# EAGLE board 51-zduino (EAGLE 5.07)
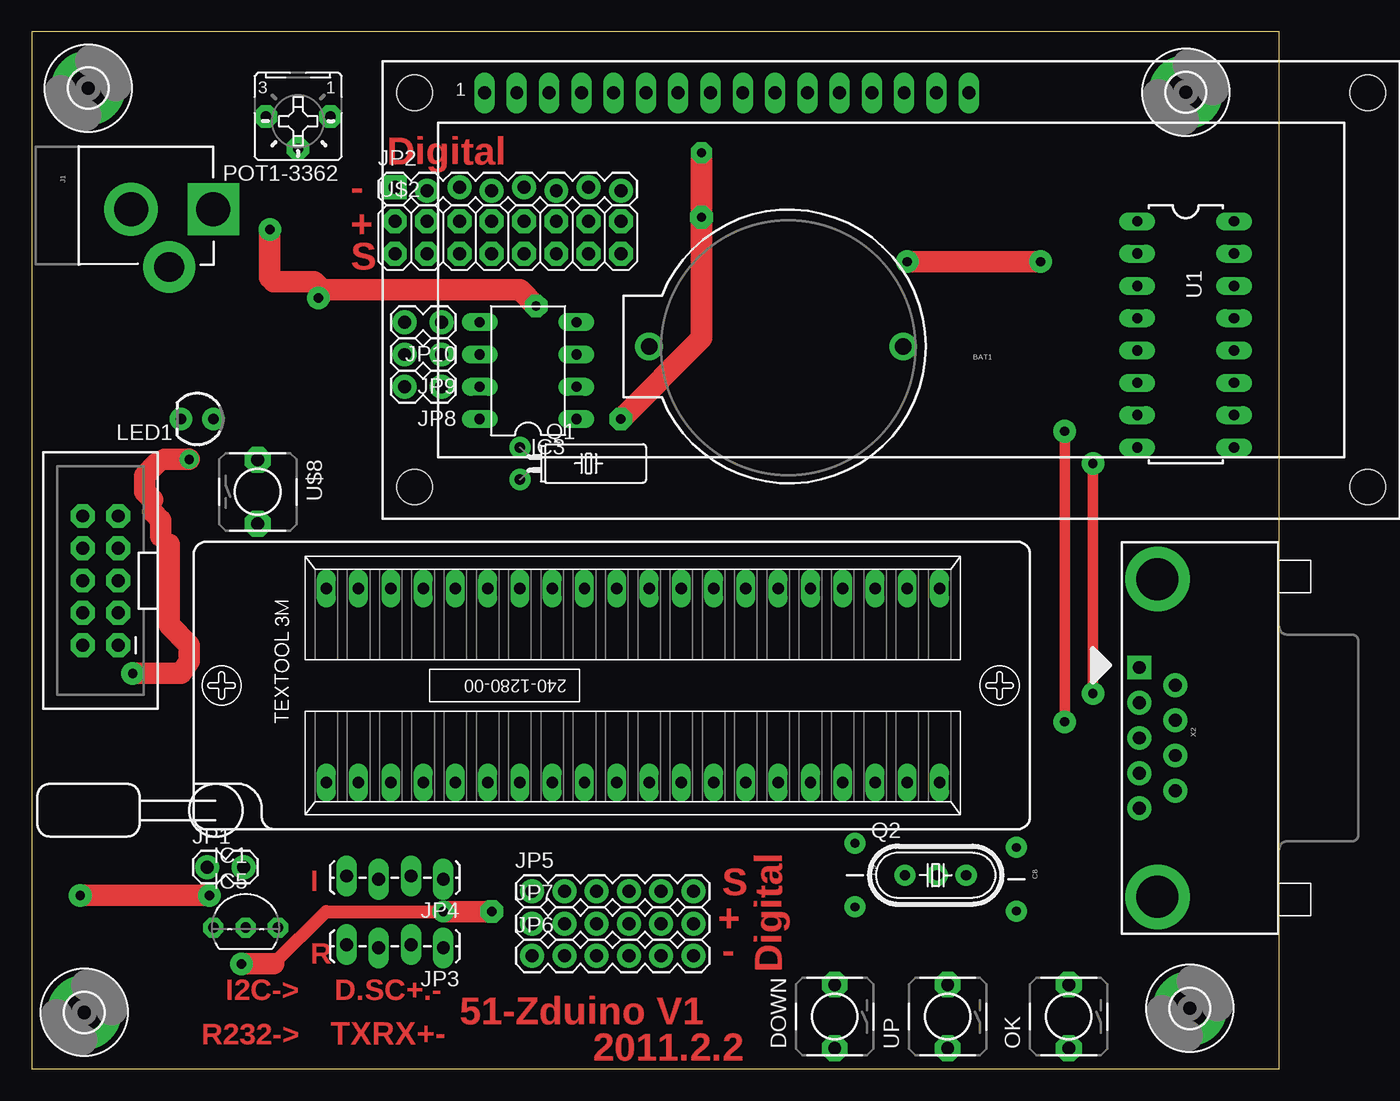
[diagram p0: board, top side]
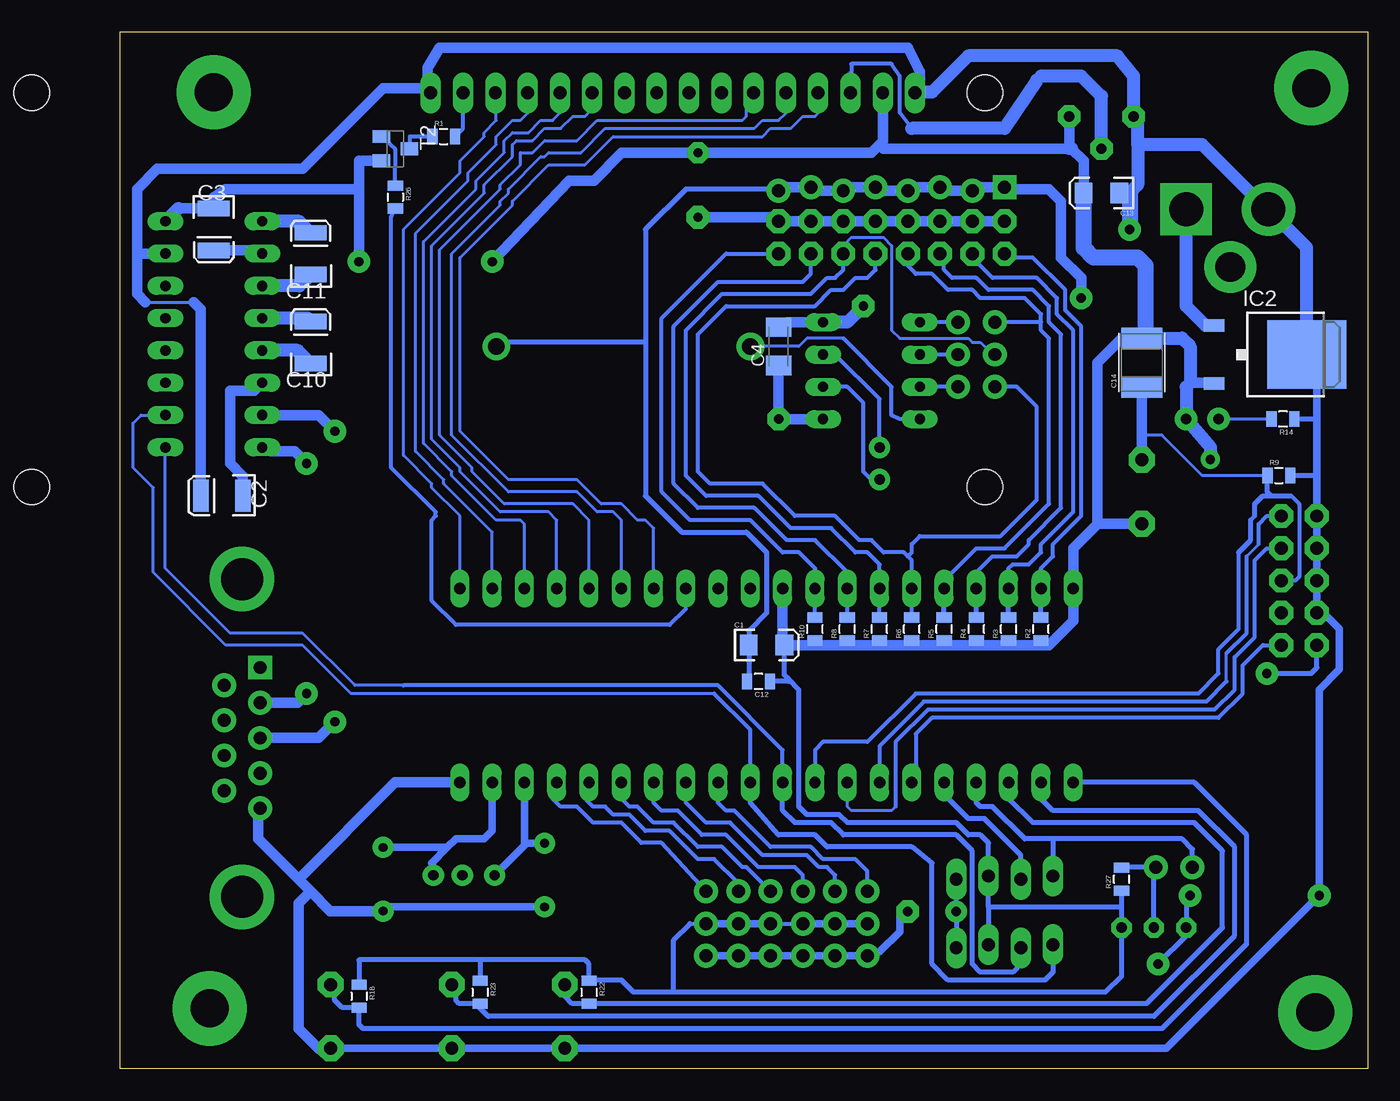
[diagram p1: board, bottom side, seen from below]

Size 98.17 x 81.58 mm. Coordinates in mm from the lower left corner, seen from the top.
Outline: 0,0 98.17,0 98.17,81.58 0,81.58 0,0
Copper layers (1*16): Top 0.035mm / dielectric 1.5mm / Bottom 0.035mm
Design rules "SparkFun-HP1007-600x600dpi *": minimum track width 10mil, minimum drill 20mil, track to track 8mil, track to pad 8mil, pad to pad 8mil, via to via 8mil, smd to smd 8mil, copper to edge 12mil, drill to drill 28mil, minimum pad ring 12mil, minimum via ring 10mil, stop-mask expansion 4mil, vias tented up to drill 25mil, thermal gap 10mil

## Footprints (pad centres in the part's own frame; a part is rotated, then mirrored left to right if it is on the bottom)
BATTCOM_20MM_PTH = drill 1.3 pad 2.184 round: 1 20,0; 2 0,0
EIA3216 = smd 1.4 x 1.6: A 1.4,0; C -1.4,0
EIA3528 = smd 1.2 x 2.5: A 1.65,0; C -1.65,0
C1206K = smd 1.5 x 2: 1 -1.5,0; 2 1.5,0
CAP-PTH-5MM = drill 0.7 pad 1.651 round: 1 -2.5,0; 2 2.5,0
0805 = smd 0.8 x 1.2: 1 -0.9,0; 2 0.9,0
GRM43D = smd 1.65 x 3.2: A 1.927,0; C -1.927,0
ALPS-SKHV = drill 1.016 pad 2.032 octagon: 2 -2.51,0; 3 2.51,0
3,0-PAD = drill 3 pad 5.842 round: B3,0 0,0
240-1280-00-0602J = drill 0.9 long: 1 -24.13,-7.62; 2 -21.59,-7.62; 3 -19.05,-7.62; 4 -16.51,-7.62; 5 -13.97,-7.62; 6 -11.43,-7.62; 7 -8.89,-7.62; 8 -6.35,-7.62; 9 -3.81,-7.62; 10 -1.27,-7.62; 11 1.27,-7.62; 12 3.81,-7.62; 13 6.35,-7.62; 14 8.89,-7.62; 15 11.43,-7.62; 16 13.97,-7.62; 17 16.51,-7.62; 18 19.05,-7.62; 19 21.59,-7.62; 20 24.13,-7.62; 21 24.13,7.62; 22 21.59,7.62; 23 19.05,7.62; 24 16.51,7.62; 25 13.97,7.62; 26 11.43,7.62; 27 8.89,7.62; 28 6.35,7.62; 29 3.81,7.62; 30 1.27,7.62; 31 -1.27,7.62; 32 -3.81,7.62; 33 -6.35,7.62; 34 -8.89,7.62; 35 -11.43,7.62; 36 -13.97,7.62; 37 -16.51,7.62; 38 -19.05,7.62; 39 -21.59,7.62; 40 -24.13,7.62
TO252 = smd 1 x 1.6: 1 -2.28,-4.8; 2 2.28,-4.8 | smd 5.4 x 6.2: 3 0,2.5
PDIP8 = drill 0.813 long: 1 -3.81,-3.81; 2 -1.27,-3.81; 3 1.27,-3.81; 4 3.81,-3.81; 5 3.81,3.81; 6 1.27,3.81; 7 -1.27,3.81; 8 -3.81,3.81
TO92- = drill 0.813 pad 1.575 octagon: 1 -2.54,0; 2 0,0; 3 2.54,0
POWER_JACK_2.1X5.5_BIG_PTH = drill 2.667 pad 4.191 round: GND 0,-0.127 | drill 2.337 pad 4.064 round: GNDBREAK 4.547,2.87 | drill 2.667 pad 4.064 square: PWR 0,6.35
1X02_LOCK = drill 1.016 pad 1.88 round: 1 -1.448,0; 2 1.448,0
1X08_LOCK = drill 1.016 pad 1.88 square: 1 -8.89,0.127 | drill 1.016 pad 1.88 round: 2 -6.35,-0.127; 3 -3.81,0.127; 4 -1.27,-0.127; 5 1.27,0.127; 6 3.81,-0.127; 7 6.35,0.127; 8 8.89,-0.127
1X04_LOCK_LONGPADS = drill 1.016 long: 1 -3.81,0; 2 -1.27,-0.254; 3 1.27,0; 4 3.81,-0.254
1X06 = drill 1.016 pad 1.88 round: 1 -6.35,0; 2 -3.81,0; 3 -1.27,0; 4 1.27,0; 5 3.81,0; 6 6.35,0
LED3MM = drill 0.813 pad 1.778 round: A -1.27,0; K 1.27,0
B25P = drill 0.813 pad 1.778 octagon: A -2.54,0; E 2.54,0; S 0,2.54
TC38H = drill 0.813 pad 1.676 round: 1 -1.27,0; 2 1.27,0
HC49U-V-SOCK = drill 0.813 pad 1.676 round: 1 -2.413,0; 2 2.413,0; 3 0.127,0
SOT23-BEC = smd 1 x 1.4: B -0.95,-1.1; C 0,1.1; E 0.95,-1.1
DIL16 = drill 0.813 long: 1 -8.89,-3.81; 2 -6.35,-3.81; 3 -3.81,-3.81; 4 -1.27,-3.81; 5 1.27,-3.81; 6 3.81,-3.81; 7 6.35,-3.81; 8 8.89,-3.81; 9 8.89,3.81; 10 6.35,3.81; 11 3.81,3.81; 12 1.27,3.81; 13 -1.27,3.81; 14 -3.81,3.81; 15 -6.35,3.81; 16 -8.89,3.81
LCD-16X2 = drill 1.016 long: 1 -32,15.5; 2 -29.46,15.5; 3 -26.92,15.5; 4 -24.38,15.5; 5 -21.84,15.5; 6 -19.3,15.5; 7 -16.76,15.5; 8 -14.22,15.5; 9 -11.68,15.5; 10 -9.14,15.5; 11 -6.6,15.5; 12 -4.06,15.5; 13 -1.52,15.5; 14 1.02,15.5; 15 3.56,15.5; 16 6.1,15.5 | hole 2.8: -37.5,15.5; -37.5,-15.5; 37.5,15.5; 37.5,-15.5
2X8 = drill 1.016 pad 1.88 octagon: 1 -8.89,-1.27; 2 -8.89,1.27; 3 -6.35,-1.27; 4 -6.35,1.27; 5 -3.81,-1.27; 6 -3.81,1.27; 7 -1.27,-1.27; 8 -1.27,1.27; 9 1.27,-1.27; 10 1.27,1.27; 11 3.81,-1.27; 12 3.81,1.27; 13 6.35,-1.27; 14 6.35,1.27; 15 8.89,-1.27; 16 8.89,1.27
2X5-SHROUDED_LOCK = drill 1.016 pad 1.88 octagon: 1 -5.08,-1.397; 2 -5.08,1.397; 3 -2.54,-1.397; 4 -2.54,1.397; 5 0,-1.397; 6 0,1.397; 7 2.54,-1.397; 8 2.54,1.397; 9 5.08,-1.397; 10 5.08,1.397
DB9-FEMALE/90 = drill 1.016 pad 1.88 square: 1 -5.54,-1.42 | drill 1.016 pad 1.88 round: 2 -2.77,-1.42; 3 0,-1.42; 4 2.77,-1.42; 5 5.54,-1.42; 6 -4.15,1.42; 7 -1.38,1.42; 8 1.38,1.42; 9 4.15,1.42 | drill 3.302 pad 5.08 round: G1 -12.5,0; G2 12.5,0

## Placement (x,y rotation side)
BAT1  [BATTCOM_20MM_PTH]  68.58,56.83 180 top
C1  10u  [EIA3216]  47.31,33.34 0 bottom
C2  10uF  [EIA3528]  90.17,45.09 180 bottom
C3  10uF  [EIA3528]  90.81,66.04 270 bottom
C4  10uF  [C1206K]  46.35,56.83 90 bottom
C8  33pF  [CAP-PTH-5MM]  77.47,14.92 270 top
C9  33pF  [CAP-PTH-5MM]  64.77,15.24 270 top
C10  10uF  [EIA3528]  83.19,57.15 90 bottom
C11  10uF  [EIA3528]  83.19,64.14 90 bottom
C12  104  [0805]  47.94,30.48 180 bottom
C13  10u  [EIA3216]  20.95,68.9 180 bottom
C14  10u  [GRM43D]  17.78,55.56 90 bottom
DOWN  OK  [ALPS-SKHV]  63.18,4.13 90 top
H1  MOUNT-PAD-ROUND3.0  [3,0-PAD]  4.13,4.45 0 top
H2  MOUNT-PAD-ROUND3.0  [3,0-PAD]  91.12,4.76 0 top
H3  MOUNT-PAD-ROUND3.0  [3,0-PAD]  90.81,76.83 0 top
H4  MOUNT-PAD-ROUND3.0  [3,0-PAD]  4.45,77.15 0 top
IC1  AT89S51-ZS  [240-1280-00-0602J]  47.31,30.16 0 top
IC2  7805DT  [TO252]  7.3,56.2 270 bottom
IC3  [PDIP8]  39.05,54.93 90 top
IC5  DS18B20  [TO92-]  16.83,11.11 0 top
J1  POWER  [POWER_JACK_2.1X5.5_BIG_PTH]  7.94,67.63 270 top
JP1  [1X02_LOCK]  15.24,15.88 0 top
JP2  [1X08_LOCK]  37.47,69.22 0 top
JP3  RS232  [1X04_LOCK_LONGPADS]  28.57,9.53 180 top
JP4  IIC  [1X04_LOCK_LONGPADS]  28.57,14.92 180 top
JP5  [1X06]  45.72,13.97 0 top
JP6  [1X06]  45.72,8.89 0 top
JP7  [1X06]  45.72,11.43 0 top
JP8  [1X02_LOCK]  30.8,53.66 180 top
JP9  [1X02_LOCK]  30.8,56.2 180 top
JP10  [1X02_LOCK]  30.8,58.74 180 top
LED1  RED  [LED3MM]  13.02,51.12 180 top
OK  [ALPS-SKHV]  81.6,4.13 90 top
POT1-3362  10k  [B25P]  20.95,74.93 180 top
Q1  [TC38H]  38.42,47.62 270 top
Q2  12Mhz  [HC49U-V-SOCK]  71.12,15.24 0 top
R1  410  [0805]  72.71,73.34 0 bottom
R2  4.7k  [0805]  25.72,34.61 90 bottom
R3  4.7k  [0805]  28.26,34.61 90 bottom
R4  4.7k  [0805]  30.8,34.61 90 bottom
R5  4.7k  [0805]  33.34,34.61 90 bottom
R6  4.7k  [0805]  35.88,34.61 90 bottom
R7  4.7k  [0805]  38.42,34.61 90 bottom
R8  4.7k  [0805]  40.96,34.61 90 bottom
R9  10k  [0805]  6.99,46.67 0 bottom
R10  4.7k  [0805]  43.5,34.61 90 bottom
R14  270  [0805]  6.67,51.12 180 bottom
R18  10k  [0805]  79.38,5.71 270 bottom
R22  10k  [0805]  61.28,6.03 270 bottom
R23  10k  [0805]  69.85,6.03 270 bottom
R26  1k  [0805]  76.52,68.58 270 bottom
R27  4.7k  [0805]  19.37,14.92 90 bottom
T2  8550  [SOT23-BEC]  76.52,72.39 270 bottom
U1  MAX232PTH  [DIL16]  90.81,57.78 270 top
U$1  LCD-16X2  [LCD-16X2]  67.63,61.28 0 top
U$2  M08X2  [2X8]  37.47,65.41 0 top
U$6  AVR_PROG  [2X5-SHROUDED_LOCK]  5.4,38.42 90 top
U$8  RESET  [ALPS-SKHV]  17.78,45.4 270 top
UP  UP  [ALPS-SKHV]  72.07,4.13 90 top
X2  [DB9-FEMALE/90]  88.58,26.04 270 top

## Library data of the parts
BAT1 C1 C12-C14 JP1-JP10 Q1 U1 U$2 U$6 = SparkFun
C2-C4 C8-C11 DOWN IC1 IC5 J1 LED1 OK POT1-3362 Q2 R1-R10 R14 R18 R22 R23 R26 R27 T2 U$1 U$8 UP X2 = digital-toy
H1-H4 = holes
IC2 = linear
IC3 = ltc1440_lt1529_ds1302

## Nets
1W: IC5.2 JP1.2 R27.2
+VIN: IC2.1 J1.PWR
DS18B: IC1.4 JP1.1 JP4.4
DS_IO: IC1.34 JP9.2 R7.2 U$2.11
DS_RST: IC1.36 JP10.2 R5.2 U$2.7
DS_SCK: IC1.35 JP8.2 R6.2 U$2.9
GND: BAT1.2 C1.C C2.A C4.2 C8.2 C9.2 C12.2 C13.C DOWN.2 IC1.20 IC2.3 IC3.4 IC5.1 J1.GND JP2.1 JP2.2 JP2.3 JP2.4 JP2.5 JP2.6 JP2.7 JP2.8 JP3.1 JP4.1 JP6.1 JP6.2 JP6.3 JP6.4 JP6.5 JP6.6 OK.2 POT1-3362.E R9.2 R14.1 U1.15 U$1.1 U$1.16 U$6.4 U$6.6 U$6.8 U$6.10 UP.2 X2.5
KD: IC1.1 OK.3 R18.2
KO: DOWN.3 IC1.3 R22.2
KU: IC1.2 R23.2 UP.3
MISO: IC1.7 U$6.9
MOSI: IC1.6 U$6.1
N$1: IC1.27 U$1.4
N$2: IC1.26 U$1.5
N$3: IC1.25 U$1.6
N$4: IC1.24 U$1.11
N$5: IC1.23 U$1.12
N$6: C2.C U1.6
N$7: IC1.21 U$1.14
N$8: C10.C U1.5
N$9: C10.A U1.4
N$10: C11.A U1.1
N$11: C3.A U1.2
N$12: C11.C U1.3
N$13: U1.7 X2.3
N$14: C9.1 IC1.18 Q2.1
N$15: POT1-3362.S U$1.3
N$16: R1.2 U$1.15
N$17: LED1.K R14.2
N$18: IC1.28 R26.2
N$19: R1.1 T2.C
N$20: IC1.38 R3.2 U$2.3
N$21: IC1.37 R4.2 U$2.5
N$23: IC1.22 U$1.13
N$24: U1.8 X2.2
N$27: IC1.33 R8.2 U$2.13
N$28: IC1.32 R10.2 U$2.15
N$29: IC1.5 JP4.3
N$30: IC1.12 JP5.1
N$31: IC1.13 JP5.2
N$32: IC1.14 JP5.3
N$33: IC1.15 JP5.4
N$34: C8.1 IC1.19 Q2.2
N$35: IC1.16 JP5.5
N$36: IC1.17 JP5.6
N$37: IC3.2 Q1.2
N$38: IC3.3 Q1.1
N$39: BAT1.1 IC3.8
N$40: IC3.7 JP8.1
N$41: IC3.6 JP9.1
N$42: IC3.5 JP10.1
N$55: R26.1 T2.B
P0.0: IC1.39 R2.2 U$2.1
RST: C14.C IC1.9 R9.1 U$6.5 U$8.2
RXD2: IC1.10 JP3.3 U1.9
SCK: IC1.8 U$6.7
TXD2: IC1.11 JP3.4 U1.10
VCC: C1.A C3.C C4.1 C12.1 C13.A C14.A IC1.31 IC1.40 IC2.2 IC3.1 IC5.3 JP3.2 JP4.2 JP7.1 JP7.2 JP7.3 JP7.4 JP7.5 JP7.6 LED1.A POT1-3362.A R2.1 R3.1 R4.1 R5.1 R6.1 R7.1 R8.1 R10.1 R18.1 R22.1 R23.1 R27.1 T2.E U1.16 U$1.2 U$2.2 U$2.4 U$2.6 U$2.8 U$2.10 U$2.12 U$2.14 U$2.16 U$6.2 U$8.3

## Tracks (layer width: path | path; a pad name or v marks a point on that pad's centre or on a via)
1W
  Bottom 0.406: IC5.2 16.83,15.73 JP1.2 19.32,15.88 R27.2
+VIN
  Bottom 1.016: IC2.1 12.76,58.48 14.29,60.01 J1.PWR
DS18B
  Bottom 0.406: IC1.4 30.8,20.95 30.48,20.64 29.53,20.64 26.99,18.1 24.77,18.1 | 24.77,18.1 JP4.4 | JP1.1 13.79,17.29 14.61,18.1 24.77,18.1
DS_IO
  Bottom 0.254: 29.53,56.2 30.48,57.15 31.11,57.15 31.43,57.47 36.83,57.47 37.47,58.1 37.47,64.77 38.1,65.41 40.64,65.41 41.27,64.77 U$2.11
  Bottom 0.305: R7.2 IC1.34 38.42,39.69 39.37,40.64 40.32,40.64 42.23,42.55 45.4,42.55 47.94,45.09 52.07,45.09 53.66,46.67 53.66,58.1 50.8,60.96 43.81,60.96 42.55,62.23 41.91,62.23 41.27,62.87 U$2.11 | 29.53,56.2 JP9.2
DS_RST
  Bottom 0.305: IC1.36 33.34,38.42 30.8,40.96 28.57,40.96 25.08,44.45 25.08,57.47 25.72,58.1 25.72,58.74 | 25.72,58.74 25.72,59.37 26.99,60.64 30.48,60.64 31.11,61.28 33.02,61.28 34.29,62.55 35.56,62.55 36.2,63.18 U$2.7 | 25.72,58.74 JP10.2
  Bottom 0.406: R5.2 IC1.36
DS_SCK
  Bottom 0.305: R6.2 IC1.35 35.88,40.01 36.2,40.32 | 36.2,40.32 36.51,40.64 38.1,40.64 39.05,41.59 40.01,41.59 41.91,43.5 45.09,43.5 47.62,46.04 51.75,46.04 52.7,46.99 52.7,57.78 50.48,60.01 43.5,60.01 42.23,61.28 41.27,61.28 40.32,62.23 39.37,62.23 38.73,62.87 U$2.9 | JP8.2 27.62,53.66 26.04,52.07 26.04,44.77 28.89,41.91 35.24,41.91 35.88,41.27 35.88,40.64 36.2,40.32
GND  (via drill 0.74 pad 1.68, 0.74 pad 1.78)
  Top 1.016: 19.05,8.26 23.18,12.38 v32.38,12.38
  Top 1.27: 22.54,61.59 v22.54,60.64 | 18.73,62.23 19.05,61.91
  Top 1.676: v3.81,13.65 v13.97,13.65 | v16.51,8.26 19.05,8.26 | 22.54,61.59 22.23,61.91 19.05,61.91 | v18.73,66.04 18.73,62.23 | v32.38,12.38 v36.2,12.38 | v22.54,60.64 23.18,61.28 38.42,61.28 v39.69,60.01
  Bottom 0.254: 4,56.03 IC2.3 | U$1.16 74.1,77.15 | 96.2,60.33 92.39,60.33
  Bottom 0.305: 73.98,77.03 U$1.16 | JP2.1 28.45,69.22 | JP6.1 38.73,9.21
  Bottom 0.406: 4,51.12 R14.1 | 4,46.67 R9.2 | 3.49,35.88 U$6.4 | 18.73,68.9 C13.C | 18.1,74.61 POT1-3362.E | 35.57,76.83 U$1.1 | UP.2 DOWN.2 | C8.2 77.15,12.74 | JP4.1 v32.38,12.38 JP3.1 | v13.97,13.65 14.29,13.34 IC5.1 14.29,10.48 v16.51,8.26 | 82.55,1.59 81.63,1.59 OK.2 | 56.83,57.15 56.83,66.04 53.66,69.22 46.48,69.22 JP2.8 | 56.83,57.15 56.83,45.09 53.98,42.23 48.9,42.23 47.31,40.64 47.31,35.88 48.71,34.48 C1.C 48.71,30.48 C12.2 | BAT1.2 68.26,57.15 56.83,57.15
  Bottom 0.61: U$6.4 U$6.6 U$6.8 U$6.10 4,46.67 4,51.12 4,56.03 | 3.49,35.88 2.22,34.61 2.22,31.43 3.81,29.84 v3.81,13.65 15.85,1.62 UP.2 OK.2 | 77.15,12.74 C9.2 | JP6.6 JP6.5 JP6.4 JP6.3 JP6.2 JP6.1 38.42,9.21 36.83,10.79 36.83,12.06 v36.2,12.38
  Bottom 0.813: 35.24,77.16 35.24,78.42 36.2,80.33 73.03,80.33 73.98,78.74 73.98,77.03 | JP2.8 46.1,69.34 JP2.7 43.56,69.09 JP2.6 41.02,69.34 JP2.5 38.48,69.09 JP2.4 35.94,69.34 JP2.3 33.4,69.09 JP2.2 30.86,69.34 JP2.1 28.57,69.22 25.08,69.22 24.13,68.26 24.13,63.82 22.54,62.23 v22.54,60.64 | 82.55,1.59 84.14,3.17 84.14,13.02 83.19,13.97 | IC3.4 45.72,58.74 C4.2 | 96.84,64.14 U1.15 | 96.84,64.14 96.84,69.22 95.25,70.8 83.82,70.8 77.47,77.15 74.1,77.15 | C2.A 91.82,59.75 92.39,60.33 | 96.2,60.33 96.84,60.96 96.84,64.14 | C8.2 81.64,12.42 83.19,13.97 | 83.19,13.97 84.14,14.92 | 84.14,14.92 87.31,18.1 87.31,20.34 | IC1.20 76.52,22.54 84.14,14.92
  Bottom 1.016: IC2.3 4.8,64.62 J1.GND 7.94,67.63 13.02,72.71 18.1,72.71 | 18.73,68.9 18.1,69.53 18.1,72.71 | 18.1,72.71 18.1,74.61 | POT1-3362.E 18.41,78.11 19.68,79.69 31.43,79.69 34.29,76.83 35.57,76.83 | U$1.1 35.24,77.16 | IC3.4 40.96,58.74 v39.69,60.01 | 87.31,20.34 X2.5
  Bottom 1.27: 18.73,68.9 v18.73,66.04
  pour Bottom (isolate 1.016, hatched): -24.45,111.76 143.83,99.38 143.83,86.36 -23.18,92.08
  pour Top (isolate 2.54, hatched): -11.11,-15.24 115.57,-9.84 115.25,-22.54 -12.7,-33.97
KD
  Bottom 0.406: IC1.1 13.65,22.54 9.53,18.41 9.53,9.84 16.19,3.17 79.06,3.17 79.38,3.49 R18.2 80.7,4.82 81.28,5.4 81.28,6.32 OK.3
KO
  Bottom 0.406: IC1.3 28.26,21.27 26.35,19.37 13.65,19.37 11.43,17.14 11.43,11.11 17.41,5.13 R22.2 62.6,5.13 63.18,5.71 DOWN.3
KU
  Bottom 0.406: IC1.2 25.72,21.27 24.77,20.32 13.34,20.32 10.48,17.46 10.48,10.48 16.83,4.13 69.22,4.13 69.85,4.76 R23.2 71.49,5.13 71.75,5.4 71.75,6.32 UP.3
MISO
  Bottom 0.254: 9.53,40.32 8.57,41.27 | 11.11,30.48 11.11,32.7
  Bottom 0.305: U$6.9 7.94,43.5 8.57,42.86 8.57,41.27 | 9.53,40.32 9.53,34.29 11.11,32.7 | 11.11,30.48 12.7,28.89 34.92,28.89 38.42,25.4 IC1.7
MOSI
  Bottom 0.305: U$6.1 8.26,33.34 9.84,31.75 9.84,29.53 11.75,27.62 34.29,27.62 35.56,26.35 35.56,22.86 IC1.6
N$1
  Bottom 0.254: IC1.27 56.2,42.55 56.83,43.18 57.47,43.18 58.74,44.45 60.33,44.45 62.23,46.35 67.63,46.35 71.44,50.16 71.44,63.82 67.31,67.94 67.31,68.26 64.45,71.12 61.59,71.12 59.37,73.34 47.62,73.34 46.99,73.98 45.4,73.98 44.45,74.93 43.5,74.93 42.86,75.56 42.86,76.39 U$1.4
N$2
  Bottom 0.254: U$1.5 45.79,75.18 46.35,74.61 47.62,74.61 48.26,73.98 60.01,73.98 61.91,72.07 64.45,72.07 64.77,71.75 65.09,71.75 67.63,69.22 67.63,68.9 68.26,68.26 68.26,67.94 72.07,64.14 72.07,49.85 67.63,45.4 62.23,45.4 60.64,43.81 59.37,43.81 58.74,43.18 IC1.26
N$3
  Bottom 0.254: IC1.25 61.28,43.18 62.55,44.45 67.94,44.45 70.48,46.99 70.48,47.31 73.03,49.85 73.03,64.45 68.26,69.22 68.26,69.53 66.67,71.12 66.67,72.07 65.72,72.07 64.77,73.03 62.23,73.03 60.64,74.61 49.21,74.61 48.9,74.93 48.9,76.21 U$1.6
N$4
  Bottom 0.254: U$1.11 61.03,75.5 61.59,74.93 62.55,74.93 63.5,73.98 64.77,73.98 65.72,73.03 66.99,73.03 67.31,72.71 67.31,71.75 69.53,69.53 69.53,68.9 73.66,64.77 73.66,49.53 71.44,47.31 71.44,46.99 68.26,43.81 64.45,43.81 63.82,43.18 IC1.24
N$5
  Bottom 0.254: IC1.23 66.36,42.86 66.67,43.18 68.58,43.18 72.07,46.67 72.07,46.99 74.3,49.21 74.3,65.09 70.17,69.22 70.17,69.85 67.94,72.07 67.94,73.03 67.31,73.66 66.04,73.66 65.09,74.61 64.14,74.61 63.5,75.25 63.5,76.71 U$1.12
N$6
  Bottom 0.813: C2.C 88.52,46.61 89.53,47.62 89.53,53.34 87.63,53.34 U1.6
N$7
  Bottom 0.254: IC1.21 71.44,43.5 73.66,45.72 73.66,46.04 75.88,48.26 75.88,66.04 71.44,70.48 71.44,71.44 69.53,73.34 69.53,73.66 68.58,74.61 68.58,76.71 U$1.14
N$8
  Bottom 1.016: U1.5 84.2,56.52 C10.C
N$9
  Bottom 0.305: C10.A 83.44,59.05
  Bottom 1.016: 83.44,59.05 U1.4
N$10
  Bottom 1.016: U1.1 84.08,66.67 C11.A
N$11
  Bottom 0.813: C3.A 87.25,64.39 U1.2
N$12
  Bottom 1.016: U1.3 84.08,61.59 C11.C
N$13  (via drill 0.74 pad 1.78)
  Top 0.813: v81.28,27.3 v81.28,50.16
  Bottom 0.813: X2.3 82.55,26.04 v81.28,27.3 | v81.28,50.16 82.55,51.44 U1.7
N$14
  Bottom 0.406: 66.36,17.59 66.36,17.78 66.32,17.74
  Bottom 0.61: 66.36,17.78 IC1.18 | 66.36,17.59 Q2.1 | C9.1 66.32,17.74
N$15
  Bottom 0.305: 35.88,73.98 36.83,75.25 36.83,78.11 37.47,79.06 40.64,79.06 40.64,78.42 40.96,78.11 40.96,76.52 40.64,76.2 40.64,76.71 U$1.3
  Bottom 0.406: 25.72,78.11 26.04,77.79
  Bottom 1.016: 26.04,77.79 28.57,73.98 35.88,73.98 | POT1-3362.S 20.95,76.52 22.54,78.11 25.72,78.11
N$16
  Bottom 0.305: U$1.15 71.19,73.96 R1.2
N$17
  Bottom 0.254: R14.2 LED1.K
N$18
  Bottom 0.305: IC1.28 53.66,36.2 54.93,34.92 71.75,34.92 73.66,36.83 73.66,43.18 73.34,43.5 73.34,43.81 76.83,47.31 76.83,67.05 R26.2
N$19
  Bottom 0.305: R1.1 75.39,73.34 T2.C
N$20
  Bottom 0.305: IC1.38 28.26,39.37 27.94,39.69 26.67,39.69 25.72,40.64 25.72,41.27 23.18,43.81 23.18,58.1 24.45,59.37 24.45,60.64 26.04,62.23 29.53,62.23 30.8,63.5 30.8,63.82 U$2.3
  Bottom 0.406: R3.2 IC1.38
N$21
  Bottom 0.305: IC1.37 30.8,39.05 29.53,40.32 27.62,40.32 26.67,41.27 26.67,41.59 24.13,44.13 24.13,57.78 25.08,58.74 25.08,60.01 26.35,61.28 29.84,61.28 30.8,62.23 32.7,62.23 33.34,62.87 33.34,63.82 U$2.5
  Bottom 0.406: R4.2 IC1.37
N$23
  Bottom 0.254: IC1.22 68.9,42.23 72.71,46.04 72.71,46.35 74.93,48.58 74.93,65.72 70.8,69.85 70.8,70.48 68.58,72.71 68.58,73.34 67.31,74.61 66.67,74.61 66.04,75.25 66.04,76.71 U$1.13
N$24  (via drill 0.74 pad 1.78)
  Top 0.813: v83.5,29.53 v83.5,47.62
  Bottom 0.813: X2.2 84.22,28.8 v83.5,29.53 | v83.5,47.62 84.45,48.58 86.04,48.58 86.36,48.9
  Bottom 1.016: 86.36,48.9 U1.8
N$27
  Bottom 0.305: R8.2 IC1.33 40.96,39.05 43.5,41.59 45.72,41.59 48.26,44.13 52.7,44.13 54.61,46.04 54.61,58.42 51.12,61.91 44.45,61.91 43.81,62.55 U$2.13
N$28
  Bottom 0.305: R10.2 IC1.32 43.5,39.37 44.77,40.64 46.04,40.64 48.58,43.18 53.34,43.18 55.56,45.4 55.56,59.05 50.48,64.14 U$2.15
N$29
  Bottom 0.406: IC1.5 33.34,21.59 31.43,19.68 30.16,19.68 27.3,16.83 JP4.3
N$30
  Bottom 0.305: JP5.1 39.37,15.56 40.32,16.51 42.86,16.51 43.81,17.46 46.99,17.46 49.85,20.32 50.48,20.32 51.12,20.95 IC1.12
N$31
  Bottom 0.305: JP5.2 41.91,15.24 42.55,15.88 43.18,15.88 44.13,16.83 47.62,16.83 50.16,19.37 52.07,19.37 53.66,20.95 IC1.13
N$32
  Bottom 0.305: JP5.3 44.45,15.24 45.09,15.88 47.94,15.88 50.48,18.41 52.39,18.41 54.29,20.32 55.56,20.32 56.2,20.95 IC1.14
N$33
  Bottom 0.305: JP5.4 48.9,15.88 49.21,15.88 50.8,17.46 52.7,17.46 54.61,19.37 56.2,19.37 57.47,20.64 58.1,20.64 58.74,21.27 IC1.15
N$34
  Bottom 0.406: 73.66,15.37 73.66,16.19
  Bottom 0.61: IC1.19 68.9,18.73 69.53,18.1 71.75,18.1 72.43,17.42 | 73.66,16.19 72.43,17.42 | Q2.2 73.66,15.37 | 72.43,17.42 C8.1
N$35
  Bottom 0.305: JP5.5 49.53,14.61 51.44,16.51 52.7,16.51 54.93,18.73 56.83,18.73 58.1,20 59.37,20 60.01,20.64 60.96,20.64 61.59,21.27 61.59,22.23 IC1.16
N$36
  Bottom 0.305: JP5.6 55.56,17.78 57.15,17.78 58.74,19.37 60.96,19.37 62.23,20.64 63.5,20.64 64.14,21.27 64.14,22.23 IC1.17
N$37
  Bottom 0.305: Q1.2 39.05,46.35 39.69,46.99 39.69,52.39 40.96,53.66 IC3.2
N$38
  Bottom 0.305: Q1.1 38.42,52.7 41.91,56.2 IC3.3
N$39
  Bottom 0.254: 41.27,57.47 44.13,57.47 44.77,56.83 BAT1.1
  Bottom 0.305: IC3.8 36.83,51.12 37.47,51.44 37.47,53.66 41.27,57.47
N$40
  Bottom 0.305: JP8.1 IC3.7
N$41
  Bottom 0.305: JP9.1 IC3.6
N$42
  Bottom 0.305: JP10.1 IC3.5
N$55
  Bottom 0.305: T2.B 76.52,72.34 R26.1
P0.0
  Bottom 0.305: IC1.39 25.72,39.37 24.77,40.32 24.77,41.27 22.54,43.5 22.54,58.42 23.81,59.69 23.81,61.28 26.35,63.82 28.26,63.82 U$2.1
  Bottom 0.406: R2.2 IC1.39
RST
  Bottom 0.254: R9.1 13.02,46.67 16.19,49.85 17.78,49.85 | 17.75,47.97 U$8.2
  Bottom 0.305: U$6.5 5.71,38.42 5.4,38.73 5.4,44.45 6.03,45.09 | 9.21,43.18 8.89,43.5 | 10.16,40.64 10.16,34.61 11.75,33.02 11.75,31.11 13.34,29.53 35.56,29.53 39.37,25.72 42.86,25.72 43.5,25.08 IC1.9
  Bottom 0.406: 7.62,45.09 8.26,45.09 8.89,44.45 8.89,43.5 | 7.62,45.09 6.03,45.09 | 9.21,43.18 9.21,41.59 10.16,40.64 | R9.1 7.88,45.35 7.62,45.09
  Bottom 0.813: C14.C 17.78,49.85 17.78,48.58 17.75,47.97
RXD2
  Bottom 0.254: 75.88,30.16 79.69,30.16 83.82,34.29 89.53,34.29 94.61,39.37 U1.9
  Bottom 0.305: 75.88,30.16 51.12,30.16 46.04,25.08 IC1.10
  Bottom 0.406: IC1.10 46.04,20.32 45.09,19.37 42.23,19.37 41.27,18.41 32.38,18.41 31.11,17.14 31.11,8.26 30.48,7.62 27.94,7.62 27.3,8.26 JP3.3
SCK
  Bottom 0.254: 37.15,20.64 37.47,20.32 40.64,20.32 40.96,20.64 IC1.8
  Bottom 0.305: U$6.7 7.94,40.96 8.89,40.01 8.89,33.97 10.48,32.38 10.48,29.84 12.06,28.26 34.61,28.26 37.15,25.72 37.15,20.64
TXD2
  Bottom 0.254: 51.44,29.53 80.01,29.53 83.82,33.34 89.85,33.34 95.57,39.05 95.57,45.72 97.16,47.31 97.16,50.8 96.52,51.44 U1.10
  Bottom 0.305: IC1.11 48.58,26.67 51.44,29.53
  Bottom 0.406: JP3.4 24.77,7.62 25.4,6.99 33.02,6.99 34.29,8.26 34.29,16.19 35.88,17.46 42.55,17.46 43.5,18.41 46.35,18.41 48.58,20.95 IC1.11
VCC  (via drill 0.74 pad 1.5, 0.74 pad 1.68, 0.74 pad 1.78)
  Top 0.254: 10.16,47.62 9.84,47.62
  Top 1.016: 10.16,41.91 10.79,41.27 | 9.53,44.77 9.53,43.81 | 10.48,47.94 10.16,47.62
  Top 1.676: v7.94,31.11 11.75,31.11 12.38,32.07 12.38,33.34 10.79,34.92 10.79,41.27 | 10.16,41.91 10.16,43.18 9.53,43.81 | 9.53,44.77 8.89,45.4 8.89,46.67 9.84,47.62 | v12.38,47.94 10.48,47.94 | v68.9,63.5 v79.38,63.5 | v46.35,51.12 52.7,57.47 v52.7,66.99 v52.7,72.07
  Bottom 0.254: 18.1,57.47 C14.A | 79.38,71.44 79.06,71.44
  Bottom 0.305: 17.46,57.49 17.78,57.78 | JP7.4 JP7.3 | JP7.5 50.16,11.75 | 53.34,11.43 JP7.6 | 46.67,66.99 U$2.16 | 35.88,33.34 R6.1 | 38.42,33.34 R7.1 | 40.96,33.34 R8.1 | 43.5,33.34 R10.1
  Bottom 0.406: U$6.2 4,31.56 4.45,31.11 v7.94,31.11 | U$8.3 17.81,42.86 | 13.97,53.98 14.29,53.66 | 12.16,53.98 IC2.2 | 18.66,57.47 18.34,57.78 | 21.24,42.89 21.27,42.92 | C14.A 17.46,57.81 | C1.A 45.91,30.98 45.56,30.64 | 45.56,30.64 44.77,29.84 44.77,20.64 44.13,20 41.59,20 40.96,19.37 32.38,19.37 31.43,18.41 30.48,18.41 29.84,17.78 JP4.2 29.84,12.7 | 69.85,8.57 61.59,8.57 61.28,8.26 R22.1 61.23,6.99 58.74,6.99 57.78,6.03 54.61,6.03 | 69.85,8.57 79.38,8.57 R18.1 | 69.85,8.57 R23.1 | 25.72,33.34 R2.1 | R3.1 28.26,33.39 27.94,33.34 | 30.8,33.34 R4.1 | 33.34,33.34 R5.1 | 29.84,12.7 JP3.2 | 19.37,12.7 IC5.3 19.37,7.3 20.64,6.03 54.61,6.03 | 19.37,12.7 R27.1 | 19.37,12.7 29.84,12.7 | 53.34,11.43 54.61,10.16 54.61,6.03 | C12.1 45.56,30.48 45.56,30.64
  Bottom 0.61: 18.34,57.78 18.1,57.47 | C1.A 46.04,33.47 | JP7.1 JP7.2 JP7.3 | JP7.4 JP7.5 JP7.6
  Bottom 0.813: 46.04,33.47 IC1.31 | C1.A 43.5,33.34 40.96,33.34 38.42,33.34 35.88,33.34 33.34,33.34 30.8,33.34 27.94,33.34 25.72,33.34 25.08,33.34 23.18,35.24 IC1.40 23.18,40.96 21.24,42.89 U$8.3 | 93.6,67.69 C3.C 90.81,68.58 89.85,69.22 79.38,69.22 | 18.66,57.47 19.37,57.47 21.27,55.56 21.27,42.92 | 79.06,71.44 T2.E | v79.38,63.5 79.38,69.22 | 79.38,69.22 79.38,71.44 | v68.9,63.5 62.87,69.85 60.9,69.85 58.74,72.07 v52.7,72.07 39.05,72.07 38.42,72.71 | 13.97,53.98 12.16,53.98 | U$1.2 38.17,72.96 38.42,72.71 | 38.42,72.71 38.1,72.39 23.5,72.39 POT1-3362.A | U$2.2 U$2.4 U$2.6 U$2.8 U$2.10 U$2.12 U$2.14 U$2.16 | C13.A 22.36,71.44 23.31,72.39 | v52.7,66.99 46.67,66.99 | IC3.1 v46.35,51.12 C4.1
  Bottom 1.016: v12.38,47.94 12.38,48.9 LED1.A 14.29,53.66 | 93.6,67.69 U1.16 | C14.A 17.46,57.49 14.63,57.49 13.97,56.83 13.97,53.98 | 23.31,72.39 23.5,72.39
  Bottom 1.27: C13.A 22.36,64.58 21.59,63.82 18.1,63.82 17.46,63.18 17.46,57.49

## Text on the board
Top: Digital | - | + | S | I | S | + | R | - | Digital | I2C-> | D.SC+.- | 51-Zduino V1 | R232-> | TXRX+- | 2011.2.2